# Altium PCB I2C_Repeater.PcbDoc
Units mil, origin at the board's own origin, x right, y up, seen from the top; angles counter-clockwise.
Board outline 3025 x 1830 mil, 4 copper layers (Top Layer, Mid Layer 1, Mid Layer 2, Bottom Layer), stack 30.315 mil thick; 25 components, 13 nets, 80 pads, 27 vias.
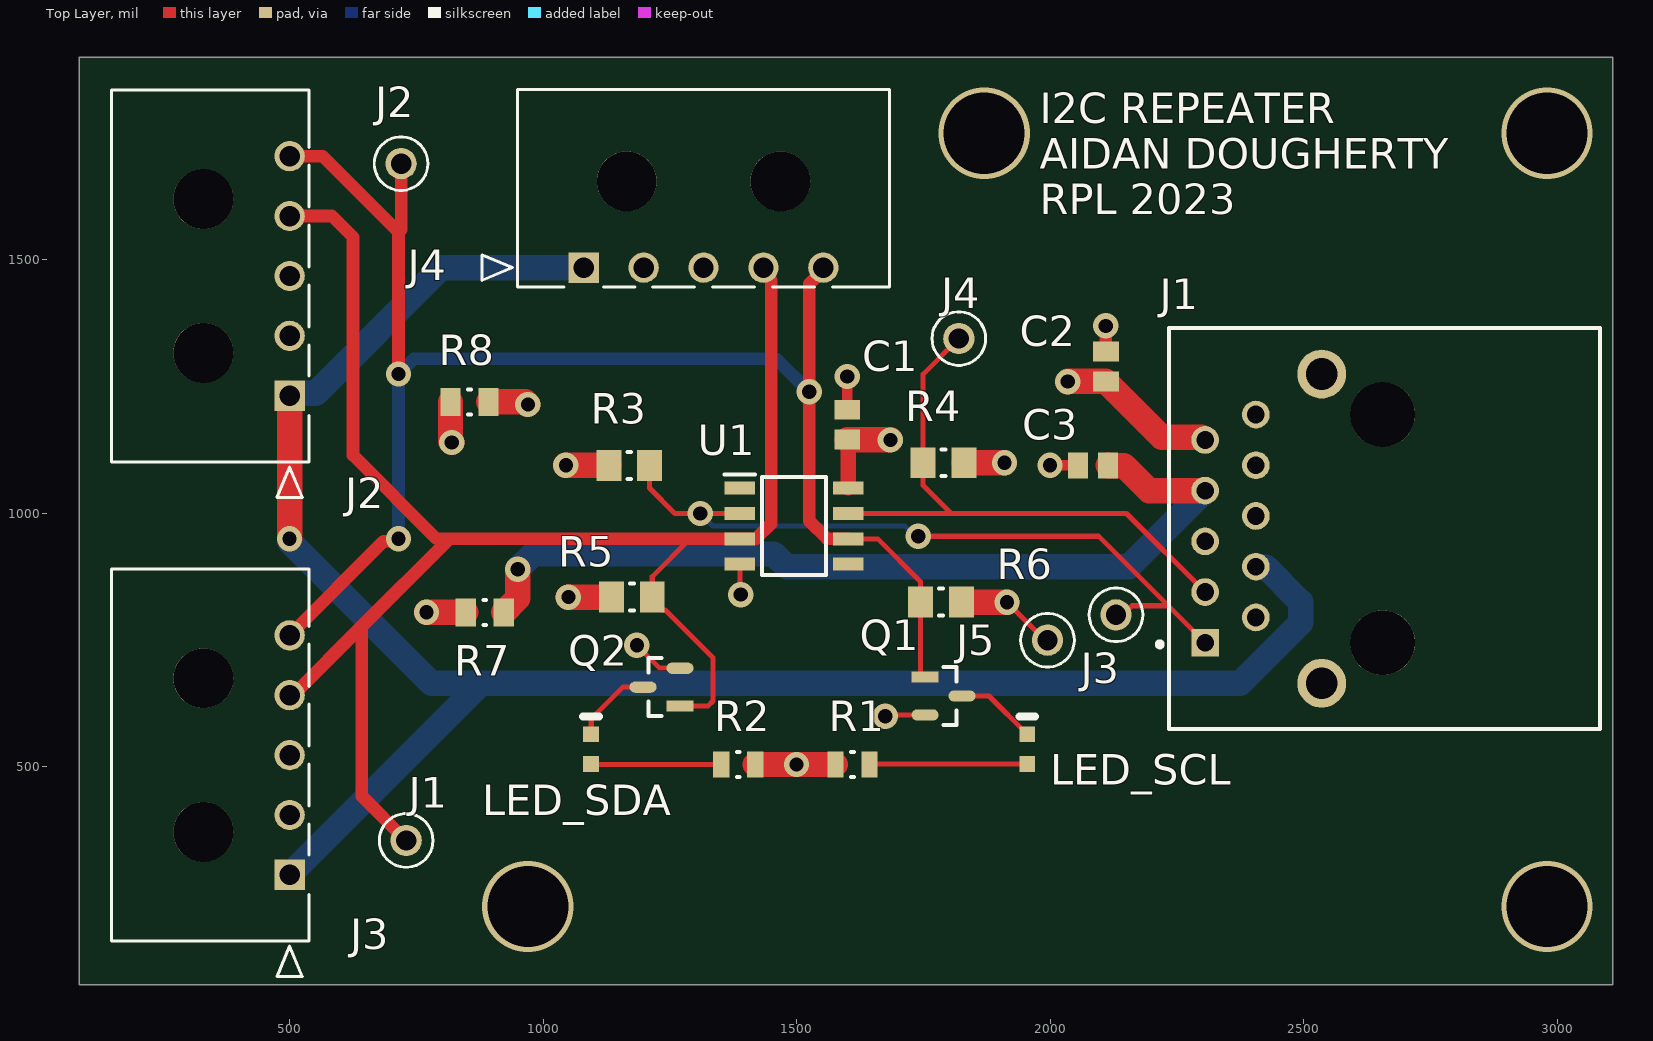
[diagram p0: Top Layer view]
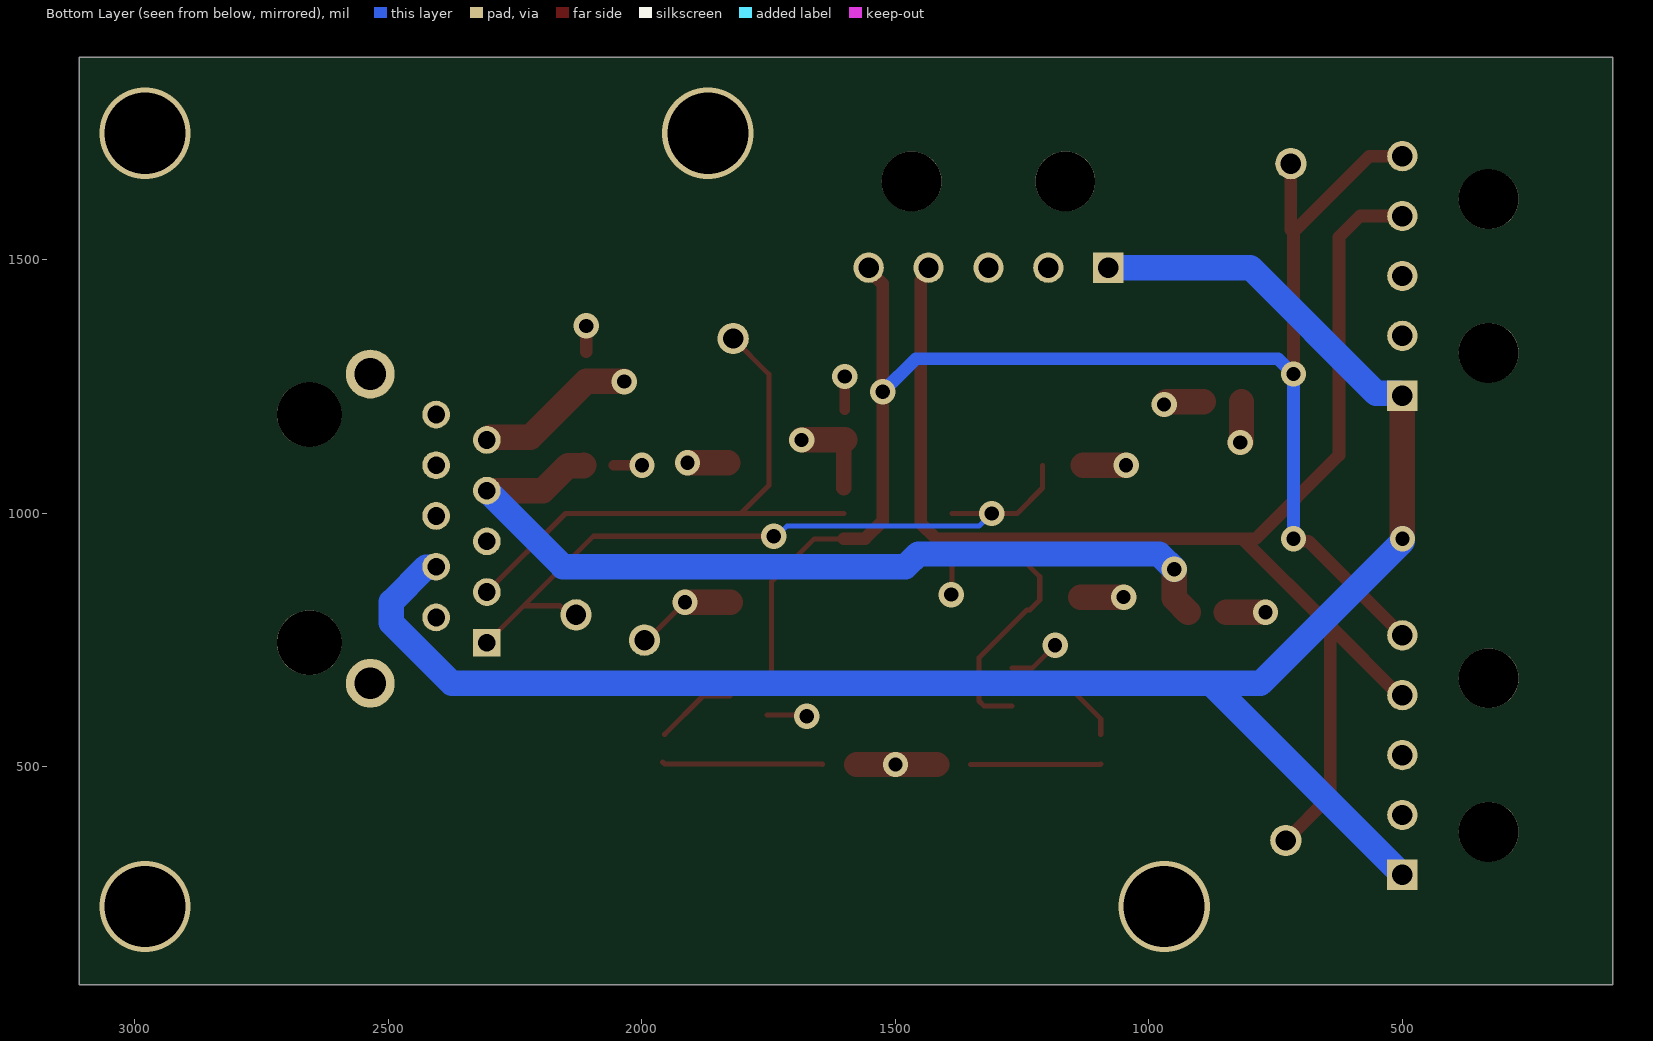
[diagram p1: Bottom Layer view, seen from below]
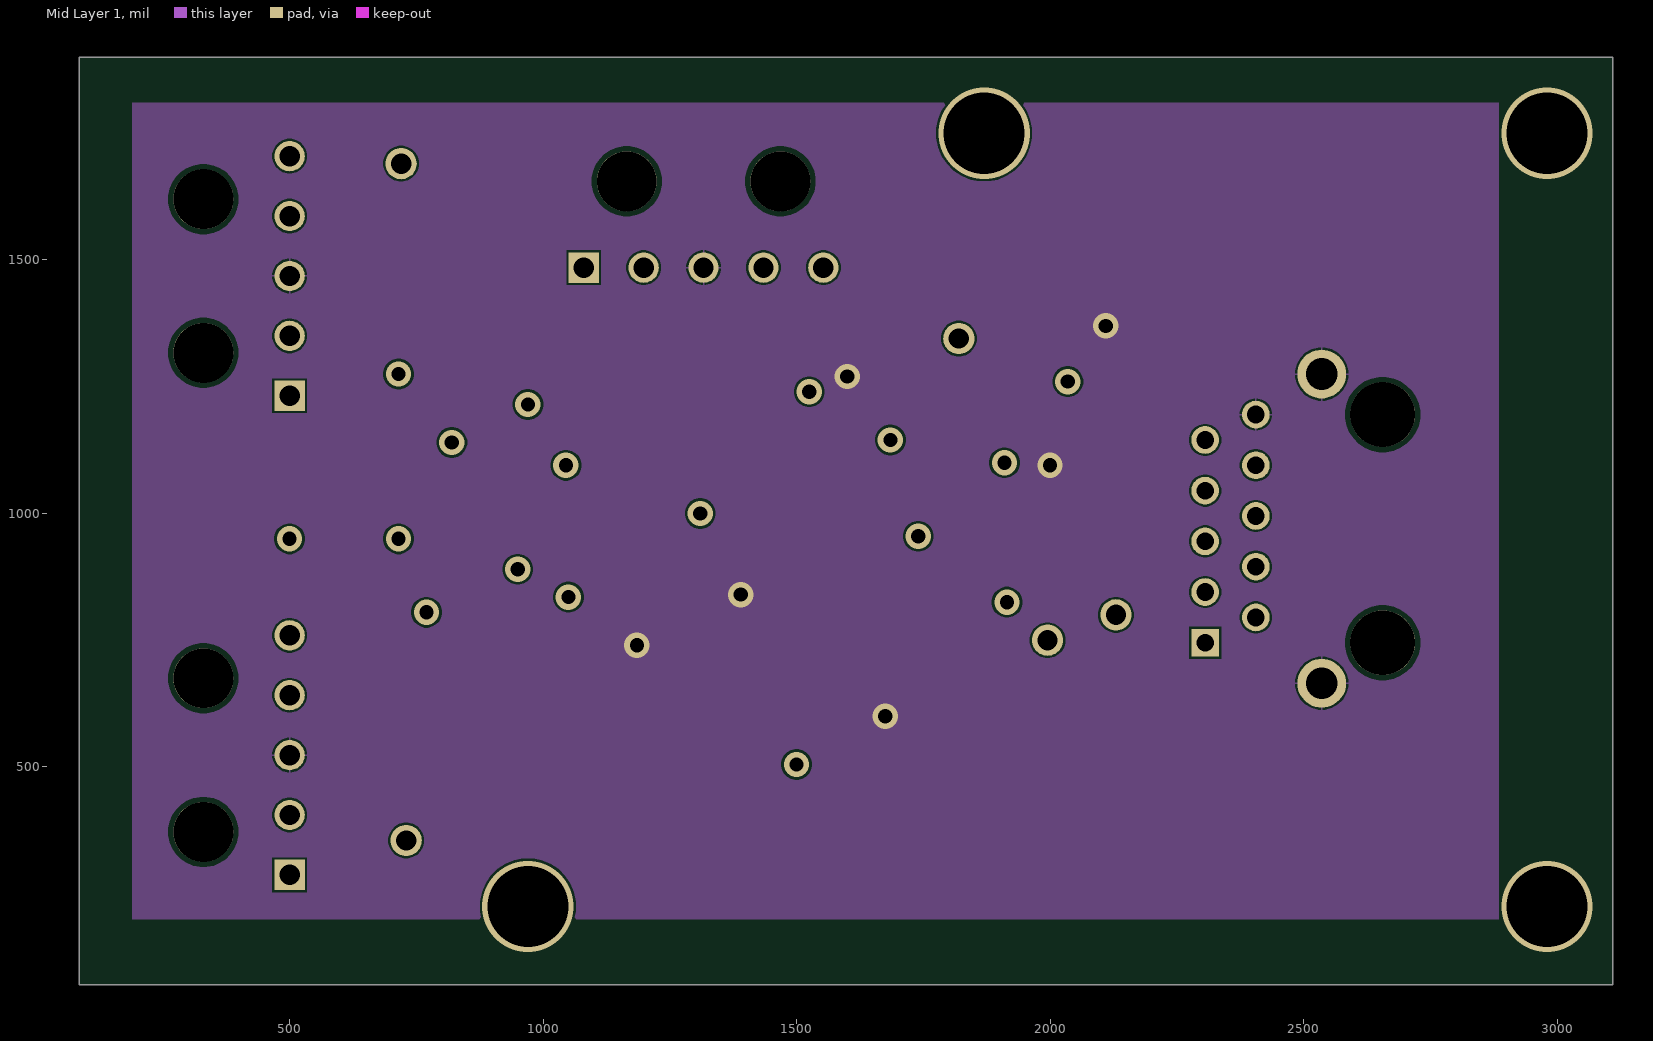
[diagram p2: Mid Layer 1]
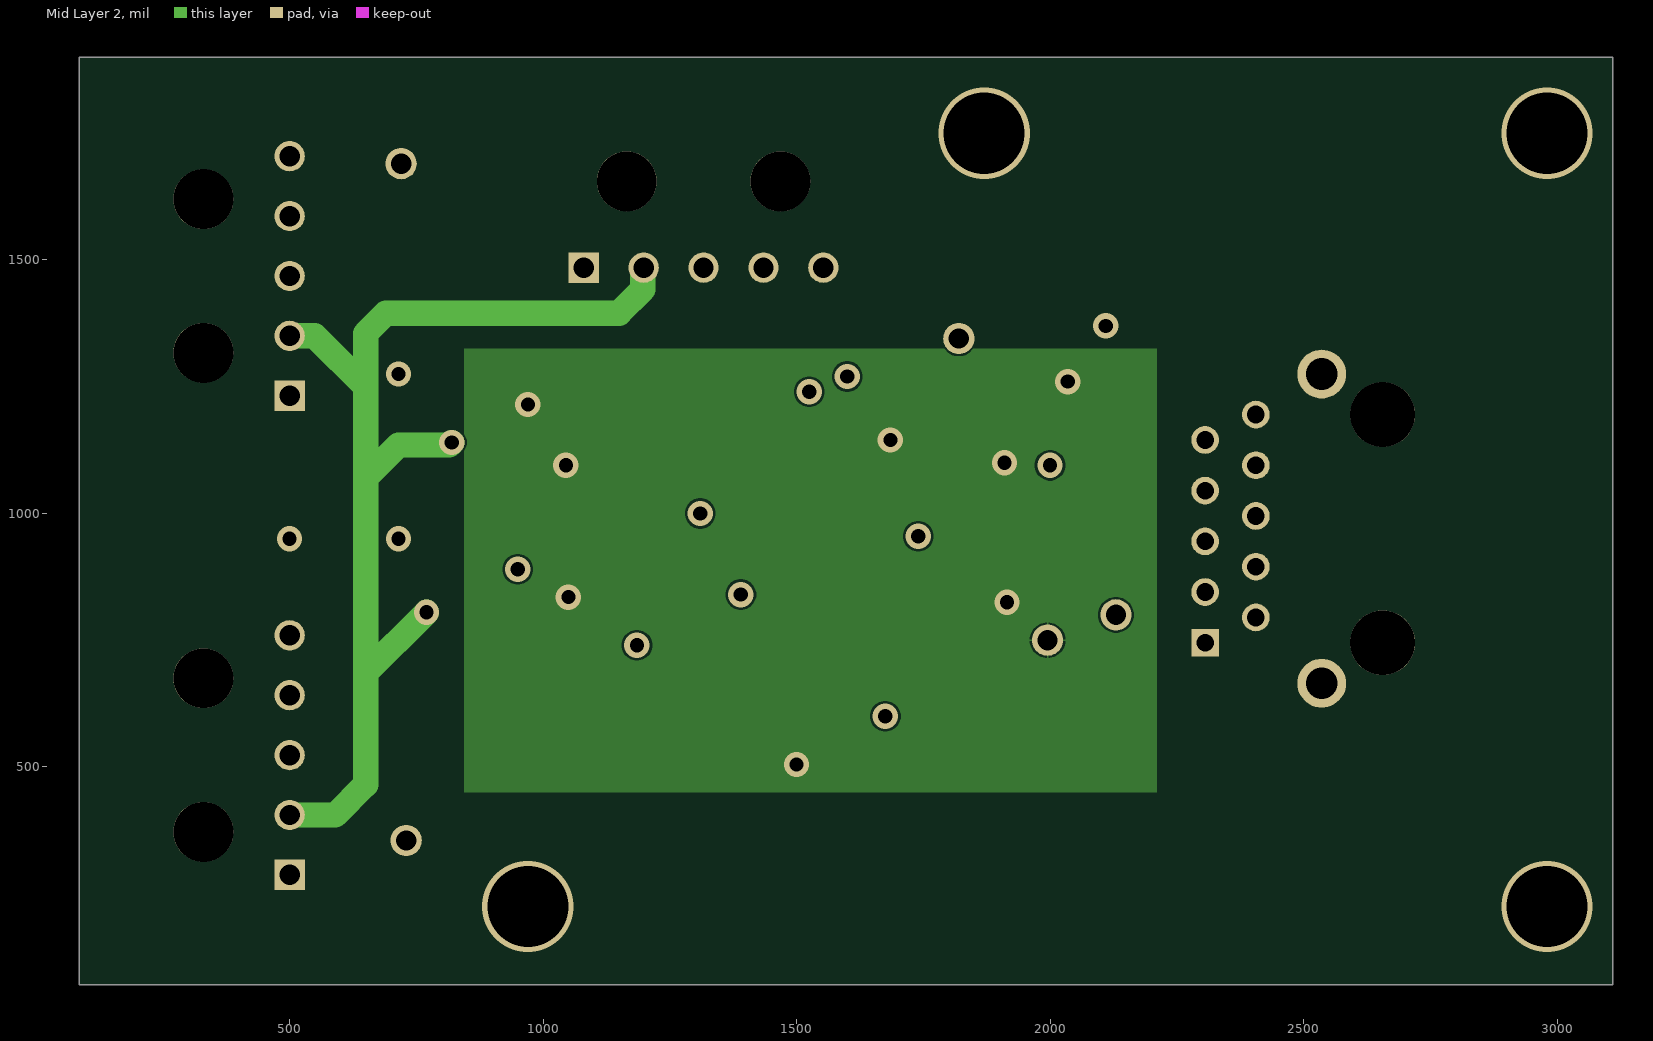
[diagram p3: Mid Layer 2]

## Layer stack, top to bottom
Top Solder: solder mask 0.5, Solder Resist, Dk 3.8
Top Layer: signal copper 1.378
Dielectric 1: prepreg 7.874, 7628, Dk 4.6
Mid Layer 1: signal copper 0.689
Core: core 10.4331, FR-4, Dk 4.5
Mid Layer 2: signal copper 0.689
Dielectric 2: prepreg 7.874, 7628, Dk 4.6
Bottom Layer: signal copper 1.378
Bottom Solder: solder mask 0.5, Solder Resist, Dk 3.8

## Board outline
85,70 3110,70 3110,1900 85,1900

## Design rules (kind name [scope] priority, off if disabled: settings)
BoardOutlineClearance [All] p1: gap=7.87 ignorepadtopadclearanceinfootprint=FALSE
Clearance [All] p1: gap=4 ignorepadtopadclearanceinfootprint=FALSE except(5: Arc-Via Track-Via SMDPad-Via THPad-Via Via-Via Via-Fill Via-Poly Via-Region Via-Text; 9.84: Arc-Hole Track-Hole SMDPad-Hole THPad-Hole Via-Hole Fill-Hole Poly-Hole Region-Hole Text-Hole)
ComponentClearance [All] p1: gap=4 collisioncheckmode=3 verticalgap=4 showdistances=TRUE
DiffPairsRouting [All] p1: maxlimit=4 minlimit=4 mostfreqgap=4 toplayer_minwidth=4 toplayer_maxwidth=71497.94 toplayer_prefwidth=4 midlayer1_minwidth=4 midlayer1_maxwidth=71497.94 midlayer1_prefwidth=4 midlayer2_minwidth=4 midlayer2_maxwidth=71497.94 midlayer2_prefwidth=4 bottomlayer_minwidth=4 bottomlayer_maxwidth=71497.94 bottomlayer_prefwidth=4 maxuncoupledlength=500
Height [All] p1: minheight=0 maxheight=71497.94 prefheight=500
HoleSize [All] p1: absolutevalues=TRUE maxlimit=248.03 minlimit=7.87 maxpercent=80.000 minpercent=20.000
HoleToHoleClearance [All] p1: gap=9.84 allowstackedmicrovias=FALSE
MinimumAnnularRing [All] p1: minimumring=3
MinimumSolderMaskSliver [All] p1: minsoldermaskwidth=0
PlaneClearance [All] p1: clearance=4
PlaneConnect PlaneConnectPowerPads [InPadClass('PowerPads')] p1: planeconnectstyle=Direct reliefexpansion=20 reliefentries=4 reliefconductorwidth=10 reliefairgap=10
PlaneConnect [All] p2: pad.planeconnectstyle=Relief pad.reliefexpansion=11.81 pad.reliefentries=4 pad.reliefconductorwidth=4 pad.reliefairgap=4 via.planeconnectstyle=Direct via.reliefexpansion=11.81 via.reliefentries=4 via.reliefconductorwidth=5 via.reliefairgap=5
PolygonConnect PolygonConnectPowerPads [All vs (InPadClass('PowerPads'))] p1: connectstyle=Direct reliefconductorwidth=10 reliefentries=4 polygonreliefangle="90 Angle" airgapwidth=10
PolygonConnect [All] p2: thpad.connectstyle=Relief thpad.reliefconductorwidth=4 thpad.reliefentries=4 thpad.polygonreliefangle="90 Angle" thpad.airgapwidth=4 smdpad.connectstyle=Relief smdpad.reliefconductorwidth=4 smdpad.reliefentries=4 smdpad.polygonreliefangle="90 Angle" smdpad.airgapwidth=4 via.connectstyle=Direct via.reliefconductorwidth=5 via.reliefentries=4 via.polygonreliefangle="90 Angle" via.airgapwidth=5
RoutingVias [All] p1: holewidth=7.87 width=17.72 viastyle="Through Hole" minholewidth=7.87 minwidth=17.72 maxholewidth=248.03 maxwidth=257.87
SilkToSilkClearance [All] p1: silktosilkclearance=0
SilkToSolderMaskClearance [IsPad] p1: minsilkscreentomaskgap=4 clearancetoexposedcopper=TRUE
SolderMaskExpansion [All] p1: expansion=2.95 istentingtop=FALSE
Width [All] p1: maxlimit=71497.94 minlimit=4 preferedwidth=4
20 further rules are at their usual default settings.

## Classes and differential pairs
component class I2C_Repeater: C1 C2 C3 J1 J2 J3 J4 J5 LED_SCL LED_SDA Q1 Q2 R1 R2 R3 R4 R5 R6 R7 R8 U1

## Components (designator, comment, footprint, x,y, rotation, side; value= is the part's Value field where it differs from the comment)
C1 "1uF 0805" CAPC2013X135X45LL10T25 1600,1175 r270 top
C2 "100uF 0805" CAPC2013X135X45LL10T25 2110,1290 r270 top
C3 "100uF 0805" CAPC2013X135X45LL10T25 2085,1095 r0 top
J1 "5004" FP-5004-MFG 730,355 r0 top
J1 "HFJ11-1G01ERL" FP-HFJ11-1G01ERL-MFG 2660,970 r90 top
J2 "5004" FP-5004-MFG 720,1690 r0 top
J2 "436500501" CON_436500501_MOL 500.08,1232.2 r270 top
J3 "5004" FP-5004-MFG 2130,800 r0 top
J3 "436500501" CON_436500501_MOL 500.08,287.2 r270 top
J4 "5004" FP-5004-MFG 1820,1345 r0 top
J4 "436500501" CON_436500501_MOL 1080.35,1484.92 r180 top
J5 "5004" FP-5004-MFG 1995,750 r0 top
LED_SCL "LTST-S270KGKT" AVAG-HSMX-C190_V 1955,535 r90 top
LED_SDA "LTST-S270KGKT" AVAG-HSMX-C190_V 1095,535 r90 top
Q1 "2N7002NXAKR" FP-SOT23-IPC_B 1790,640 r0 top
Q2 "2N7002NXAKR" FP-SOT23-IPC_B 1233.56,657.4 r180 top
R1 "120R 0805" FP-CRCW0805-e3-IPC_C 1610,505 r180 top
R2 "120R 0805" FP-CRCW0805-e3-IPC_C 1385,505 r0 top
R3 "470R 0805" RESC2013X50X30ML20T20 1170,1095 r180 top
R4 "470R 0805" RESC2013X50X30ML20T20 1790,1100 r0 top
R5 "5k 0805" RESC2013X50X30ML20T20 1175,835 r180 top
R6 "5k 0805" RESC2013X50X30ML20T20 1785,825 r0 top
R7 "0R 0805" FP-CRCW0805-e3-IPC_B 885,805 r0 top
R8 "0R 0805" FP-CRCW0805-e3-IPC_B 855,1220 r0 top
U1 "P82B715TD,118" SOIC127P600X175-8N 1495,975 r0 top

## Footprints (in the part's own frame and the unit in brackets; to place one, negate y for a bottom-side part, rotate by r counter-clockwise, add the part's x,y. Pads: shape width x height; smd on the part's side, far side on the other; paste and mask are expansions set on the pad)
AVAG-HSMX-C190_V [mm] "SMD, 2-Leads, Body 1.6x0.8mm, Height 0.9mm"
  rect 0.8x0.8 smd: 1(-0.75,0) 2(0.75,0)
  silkscreen extent 1.65,-0.4 1.65,0.4, body extent -0.8,-0.4 0.8,0.4, height 0.9
CAPC2013X135X45LL10T25 [mm] "Chip Capacitor, 2-Leads, Body 2.00x1.25mm, IPC High Density"
  rect 1x1.3 smd: 1(-0.75,0) 2(0.75,0)
  body extent -1.05,-0.67 1.05,0.68, height 1.35
CON_436500501_MOL [mm]
  rect 1.52x1.52 hole 1.02 mask+0.076: 1(0,0)
  round 1.52 hole 1.02 mask+0.076: 2(-3,0) 3(-6,0) 4(-9,0) 5(-12,0)
  round 3 hole 3 unplated mask+0.076: M1(-2.15,-4.32) M2(-9.85,-4.32)
  silkscreen extent -15.32,-8.92 5.1,0.98, body extent 0,0 0.25,0.25, height 0.25
FP-5004-MFG [mm]
  round 1.57 hole 1.02 paste-1000 mask+0: 1(0,0)
  silkscreen extent -1.35,-1.34 1.35,1.34, body extent -1.45,-1.45 1.45,1.45, height 0.25
FP-CRCW0805-e3-IPC_B [mil]
  rect 39.63x55.44 smd paste+0 mask+0: 1(-37.44,0) 2(37.44,0)
  silkscreen extent -3,-25 3,25, body extent -67,-38 67,38, height 10
FP-CRCW0805-e3-IPC_C [mil]
  rect 31.75x51.5 smd paste+0 mask+0: 1(-33.5,0) 2(33.5,0)
  silkscreen extent -3,-25 3,25, body extent -53,-31 53,31, height 10
FP-HFJ11-1G01ERL-MFG [mm]
  rect 1.39x1.39 hole 0.89 paste-1000 mask+0: 1(-5.715,8.995)
  round 1.39 hole 0.89 paste-1000 mask+0: 2(-4.445,6.455) 3(-3.175,8.995) 4(-1.905,6.455) 5(-0.635,8.995) 6(0.635,6.455) 7(1.905,8.995) 8(3.175,6.455) 9(4.445,8.995) 10(5.715,6.455)
  round 2.45 hole 1.6 paste-1000 mask+0: 15(-7.745,3.155) 16(7.745,3.155)
  round 3.25 hole 3.25 unplated paste-1000 mask+0: ""(-5.715,0.105) ""(5.715,0.105)
  silkscreen extent -10.05,-10.79 10.05,11.39, body extent -10.15,-10.89 10.15,10.89, height 0.25
FP-SOT23-IPC_B [mm]
  rect 1.355x0.562 smd paste+0 mask+0: 1(-0.925,0.95)
  rrect100% 1.355x0.562 smd paste+0 mask+0: 2(-0.925,-0.95) 3(0.925,0)
  silkscreen extent 0,-1.45 0.65,1.45, body extent -1.85,-1.7 1.85,1.7, height 0.25
RESC2013X50X30ML20T20 [mm] "Chip Resistor, 2-Leads, Body 2.00x1.25mm, IPC Low Density"
  rect 1.25x1.55 smd: 1(-1.025,0) 2(1.025,0)
  silkscreen extent -0.1,-0.67 0.1,0.67, body extent -1.1,-0.72 1.1,0.72, height 0.5
SOIC127P600X175-8N [mm]
  rect 1.525x0.65 smd: 1(-2.712,1.905) 2(-2.712,0.635) 3(-2.712,-0.635) 4(-2.712,-1.905) 5(2.712,-1.905) 6(2.712,-0.635) 7(2.712,0.635) 8(2.712,1.905)
  silkscreen extent -3.47,-2.45 1.6,2.58, body extent -3,-2.45 3,2.45, height 1.75

## Part data
C1 C2 C3: library part CMP-1036-04761-2, Manufacturer=Murata, Part Number=GRM21BR71H105KA12L
J1 J2 J3 J4 J5: library part CMP-2000-05575-2, "PC TEST POINT MINIATURE YELLOW", Manufacturer=Keystone, Automotive=No, Category=Conn, ComponentLink2Description=Datasheet, ComponentLink2URL=https://www.keyelco.com/product-pdf.cfm?p=1313, Contact Material=Silver, Device Class L1=Connectors, Device Class L2=unset, Device Class L3=unset, Digikey Description="PC TEST POINT MINIATURE YELLOW", Height=4.72mm, Is Female=yes, Lead Free=Yes, Manufacturer Part Number=5004, Mouser Description="TEST POINT PC MINI .040\"D YELLOW", Number of Contacts=1, Octopart=https://octopart.com/5004-keystone-28591, Package=5004, RoHS=TRUE
J1: library part CMP-218039-000001-2, "Conn RJ-45 F 8 POS 2.54mm Solder RA Thru-Hole 10 Terminal 1 Port", Manufacturer=HALO, Package=0, Temperature="0°C to +70°C", Temperature Range High=+70°C, Temperature Range Low=0°C, Automotive=No, Category=Conn, ComponentLink2Description=Datasheet, ComponentLink2URL=https://www.haloelectronics.com/pdf/fastjack-gigabit.pdf, Conn Gender=Female, Conn Orientation=Horizontal, Contact Material=Gold, Device Class L1=Connectors, Device Class L2="Modular / Ethernet Connectors", Device Class L3=unset, Height=0.624inch, Is Female=yes, Lead Free=Yes, Manufacturer Part Number=HFJ11-1G01ERL, Mouser Description="Conn RJ-45 F 8 POS 2.54mm Solder RA Thru-Hole 10 Terminal 1 Port", Number of Contacts=8, Octopart=https://octopart.com/hfj11-1g01erl-halo-4052130, Pitch=1.27mm, RoHS=TRUE, Shielding=true
J2 J3 J4: "No Description Available", Mfr_Name="Molex Connector Corporation", Copyright="Copyright (C) 2023 Ultra Librarian. All rights reserved.", Manufacturer_Part_Number=436500501, RefDes=RefDes, Type=DEV
LED_SCL LED_SDA: library part CMP-1744-00003-1, "LED Uni-Color Yellow, 65 mW, 20 mA, -40 to 85 degC, 2-Pin SMD, RoHS, Tape and Reel", Case Code (Imperial)=0603, Case Code (Metric)=1608, Max Operating Temperature="155 degC", Min Operating Temperature="-55 degC", Package Quantity=5000, Power Rating="100 mW", Resistance="390 Ohm", Tolerance=1%, Voltage Rating="50 V", Case\Package=0603, ComponentLink1Description="Manufacturer URL", ComponentLink1URL=http://www.avagotech.com/, ComponentLink2Description=Datasheet, ComponentLink2URL=http://docs.avagotech.com/docs/AV02-0551EN, ComponentLink3Description="Package Specification", ComponentLink3URL=http://www.fairchildsemi.com/dwg/MA/MA03D.pdf, DatasheetVersion=Mar-12, Height="0.45 mm", Length="1.6 mm", Mount="Surface Mount", PackageDescription="2-Pin Surface Mount Device, Body 1.6 x 0.8 mm, Height 0.9 mm", PackageReference=HSMX-C190, Packaging="Tape and Reel", Pins=2, REACH SVHC="No SVHC", RoHSCompliant=true, Voltage Rating (DC)="50 V", Width="0.8 mm"
Q1 Q2: library part CMP-14409-000026-2, "2N7002NXAK/SOT23/TO-236AB"
R1 R2: library part CMP-02407-007854-1, "RES Thick Film, 120Ω, 1%, 0.125W, 100ppm/°C, 0805", Case Code (Imperial)=0805, Case Code (Metric)=2012, Max Operating Temperature=155°C, Max Power Dissipation=125mW, Min Operating Temperature=-55°C, Package Quantity=10, Resistance=120R, Temperature Coefficient=100ppm/°C, Tolerance=1%, Voltage Rating=150V, Case/Package=0805, Composition="Thick Film", Contact Plating=Tin, Depth=1.25mm, Features="Automotive AEC-Q200", Height=0.45mm, Lead Free="Lead Free", Length=2mm, Military Standard=Not, Mount="Surface Mount", Number of Terminations=2, Packaging="Tape and Reel", Power Rating=125mW, Radiation Hardening=No, Termination=SMD/SMT, Voltage Rating (DC)=150V, Weight=0.000194oz, Width=1.25mm
R3 R4 R5 R6: library part CMP-2001-04239-1, Manufacturer="Vishay Dale", Part Number=CRCW08055K00FKTA
R7 R8: library part CMP-2001-04897-2, "RES Thick Film, 0Ω, 0.125W, 0805", Case Code (Imperial)=0805, Case Code (Metric)=2012, Max Operating Temperature=155°C, Max Power Dissipation=125mW, Min Operating Temperature=-55°C, Package Quantity=10000, Resistance=0mR, Voltage Rating=150V, Case/Package=0805, Composition="Thick Film", Contact Plating=Tin, Depth=1.25mm, Features="Automotive AEC-Q200", Height=0.02inch, Lead Free="Lead Free", Length=2mm, Military Standard=Not, Number of Terminations=2, Packaging="Tape and Reel", Power Rating=125mW, Radiation Hardening=No, Termination=SMD/SMT, Voltage Rating (DC)=150V, Weight=0.000194oz, Width=0.049inch
U1: "Undefined or Miscellaneous", Manufacturer_Name=NXP, Mouser Part Number=771-P82B715TD118, Arrow Part Number=P82B715TD,118, Arrow Price/Stock=https://www.arrow.com/en/products/p82b715td118/nxp-semiconductors?region=nac, Datasheet Link=http://www.nxp.com/docs/en/data-sheet/P82B715.pdf, Height=1.75mm, Manufacturer_Part_Number=P82B715TD,118, Mouser Price/Stock=https://www.mouser.co.uk/ProductDetail/NXP-Semiconductors/P82B715TD118?qs=LOCUfHb8d9tYdoWkpYDXXg%3D%3D

## Via types
v1: diameter 50, hole 28, Top Layer to Bottom Layer, 23 vias
v2: diameter 180, hole 160, Top Layer to Bottom Layer, 4 vias

## Nets (pads, with @x,y where several pads share a name; then routed paths per layer and width w, separated by ;. In a path a pad name is that pad's centre, name@x,y a point inside that pad or via, vN(x,y) a via of type N, cw(c..) or ccw(c..) an arc to the next point about the centre after c; other vN are vias at no path point)
3V3: C3.2 J1.7 R7.2 | length 1749.2
  Top Layer w50: R7.2 950,832.56 v1(950,890) ; C3.2 2115.12,1094.41 2145.59,1094.41 2195,1045 J1.7
  Bottom Layer w50: v1(950,890) 980,920 1455,920 1480,895 2155.87,895 J1.7
5V: C1.2 C2.2 J1.9 J5.1 R1.2 R2.2 R3.2 R4.2 R5.2 R6.2 R8.2 U1.8 | length 1186.1
  Top Layer w10: v1(1915,825) J5.1@1992.5,747.5
  Top Layer w20: C1.2 C1.2@1601.77,1143.7
  Top Layer w30: U1.8 C1.2@1601.77,1143.7
  Top Layer w50: R8.2 965,1220 v1(970,1215) ; v1(1045,1095) R3.2 ; v1(1050,835) R5.2 ; R2.2 v1(1500,505) R1.2 ; C1.2 1684.53,1145.47 v1(1685,1145) ; R6.2 v1(1915,825) ; R4.2 v1(1910,1100) ; v1(2035,1260) 2035.47,1260.47 C2.2 2220,1150.47 2299.12,1150.47 2304.59,1145 J1.9
GND: C1.1 C2.1 C3.1 J1.10 J1.15 J1.16 J2.3 J3.3 J4.3 Q1.2 Q2.2 U1.4 | length 415.5
  Top Layer w10: v1(1185,740) 1230.2,694.8 Q2.2 ; U1.4 1388.23,841.77 v1(1390,840) ; v1(1675,600) 1677.6,602.6 Q1.2
  Top Layer w20: C1.1 v1(1600,1270) ; v1(2000,1095) C3.1
  Top Layer w25: C2.1 v1(2110,1370)
INA_PWR: J2.2 J3.2 J4.2 R7.1 R8.1 | length 2410
  Top Layer w50: v1(770,805) R7.1 ; R8.1 817.56,1142.44 v1(820,1140)
  Mid Layer 2 w50: J3.2 590.32,405.31 650,465 650,685 ; J2.2 549.68,1350.32 650,1250 ; v1(770,805) 650,685 ; v1(820,1140) 815,1135 715,1135 650,1070 ; J4.2 1196.58,1483.04 1196.58,1441.58 1150,1395 690,1395 650,1355 650,1250 ; 650,685 650,1070 ; 650,1070 650,1250
LCL: J1.3 J4.1@1820,1345 R4.1 U1.7 | length 1165.4
  Top Layer w10: U1.7 1805,1000 ; J4.1@1820,1345 1749.65,1274.65 R4.1 1749.65,1055.35 1805,1000 ; J1.3 2150.87,1000 1805,1000
LDA: J1.1@2305.87,745 J3.1@2130,800 R3.1 U1.2 | length 1455.9
  Top Layer w10: R3.1 1210,1094.65 1210,1050 1260,1000 v1(1310,1000) U1.2 ; v1(1740,955) 2095.87,955 2232.93,817.93 ; J3.1@2130,800 2143.83,800 2161.76,817.93 2232.93,817.93 ; J1.1@2305.87,745 2232.93,817.93
  Bottom Layer w10: v1(1310,1000) 1335,975 1714.14,975 1734.14,955 v1(1740,955)
NetLED_SCL_1: LED_SCL.1 R1.1 | length 318.1
  Top Layer w10: R1.1 1643.97,505.48 LED_SCL.1 LED_SCL.1@1959.52,510
NetLED_SCL_2: LED_SCL.2 Q1.3 | length 159.8
  Top Layer w10: Q1.3 1879.53,640 LED_SCL.2
NetLED_SDA_1: LED_SDA.1 R2.1 | length 256.7
  Top Layer w10: LED_SDA.1 1095.47,505 R2.1
NetLED_SDA_2: LED_SDA.2 Q2.3 | length 158.4
  Top Layer w10: LED_SDA.2 1095,595 1157.4,657.4 Q2.3
SCL: J2.1@720,1690 J2.5 J3.5 J4.5 Q1.1 R6.1 U1.6 | length 3136
  Top Layer w10: U1.6 1660,950 1744.65,865.35 R6.1 1744.65,683.47 1750.72,677.4 Q1.1
  Top Layer w25: J3.5 685.65,945.22 710.22,945.22 v1(715,950) ; J2.5 565.35,1704.65 715,1555 ; v1(715,1275) 715,1555 ; J2.1@720,1690 720,1560 715,1555 ; J4.5 1552.79,1480.65 1525,1452.86 1525,985 1559.7,950.3 1601.48,950.3 U1.6
  Bottom Layer w25: v1(715,950) v1(715,1275) 745,1305 1460,1305 v1(1525,1240)
SDA: J1.1@730,355 J2.4 J3.4 J4.4 Q2.1 R5.1 U1.3 | length 3363.7
  Top Layer w10: Q2.1 1325,620 1335,630 1335,715.35 1240.87,809.49 1234.96,809.49 1215.35,829.09 R5.1 1215.35,875.35 1290,950
  Top Layer w25: J3.4 506.54,641.54 642.5,777.5 ; J2.4 583.46,1586.54 625,1545 625,1115 790,950 815,950 ; J1.1@730,355 642.5,442.5 642.5,777.5 ; J4.4 1434.68,1475.49 1450,1460.18 1450,980 1420.3,950.3 1388.52,950.3 U1.3 1290,950 815,950 ; 642.5,777.5 815,950
VSS_PT: J1.4 J2.1@500.08,1232.2 J3.1@500.08,287.2 J4.1@1080.35,1484.92 | length 3824.7
  Top Layer w50: v1(500,950) 500.08,950.08 J2.1@500.08,1232.2
  Bottom Layer w50: v1(500,950) 500,945 780,665 877.87,665 ; J3.1@500.08,287.2 877.87,665 ; J2.1@500.08,1232.2 505,1237.13 552.13,1237.13 799.92,1484.92 J4.1@1080.35,1484.92 ; J1.4 2406.77,894.1 2425.9,894.1 2494.29,825.71 2494.29,784.29 2375,665 877.87,665
pads on no net: J1. J1.2 J1.5 J1.6 J1.8 J2.M1 J2.M2 J3.M1 J3.M2 J4.M1 J4.M2 U1.1 U1.5
copper on no net:
  other v2: 970,225 2980,225 1870,1750 2980,1750

## Polygon pours and split planes (outlines as drawn)
GND on Mid Layer 1 "GNDTOP" (solid, pour order 1): 190,1810 2885,1810 2885,200 190,200
5V on Mid Layer 2 "GNDTOP" (solid, pour order 0): 845,1325 2210,1325 2210,450 845,450

## Silkscreen, mask and mechanical layers (free items; w line width, h text height)
Top Overlay:
  text "I2C REPEATER / AIDAN DOUGHERTY / RPL 2023" at 1980,1590 h60
Mechanical 1:
  the board outline again, w10